# Altium PCB Battery PCB 8x4 Rev.PcbDoc
Units mm, origin at the board's own origin, x right, y up, seen from the top; angles counter-clockwise.
Board outline 138 x 291 mm, 2 copper layers (Top Layer, Bottom Layer), stack 1.571 mm thick; 33 components, 16 nets, 112 pads, 0 vias.
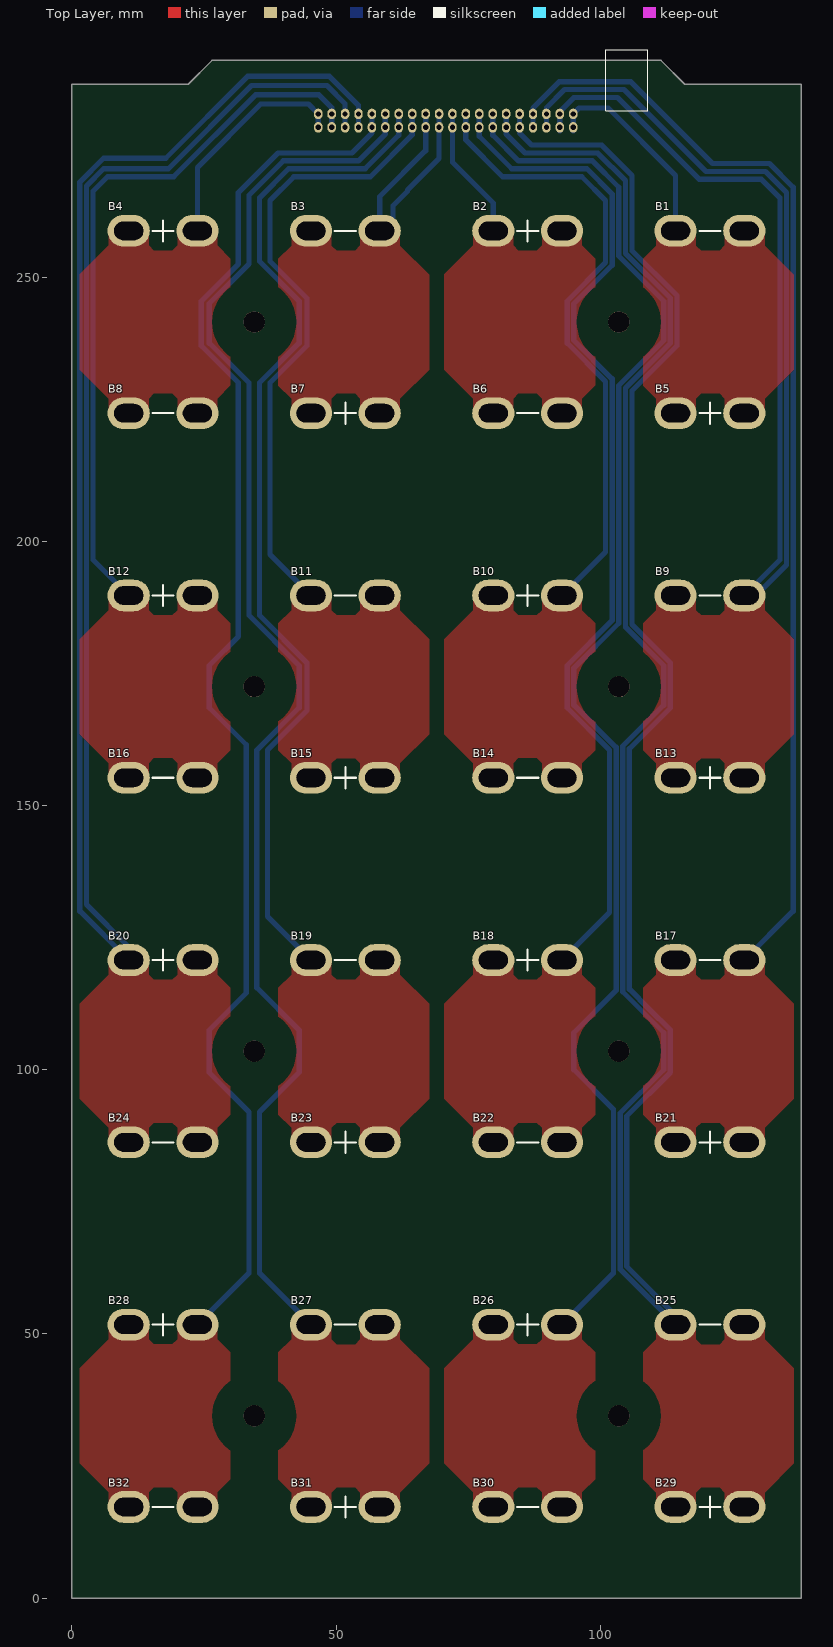
[diagram p0: Top Layer view]
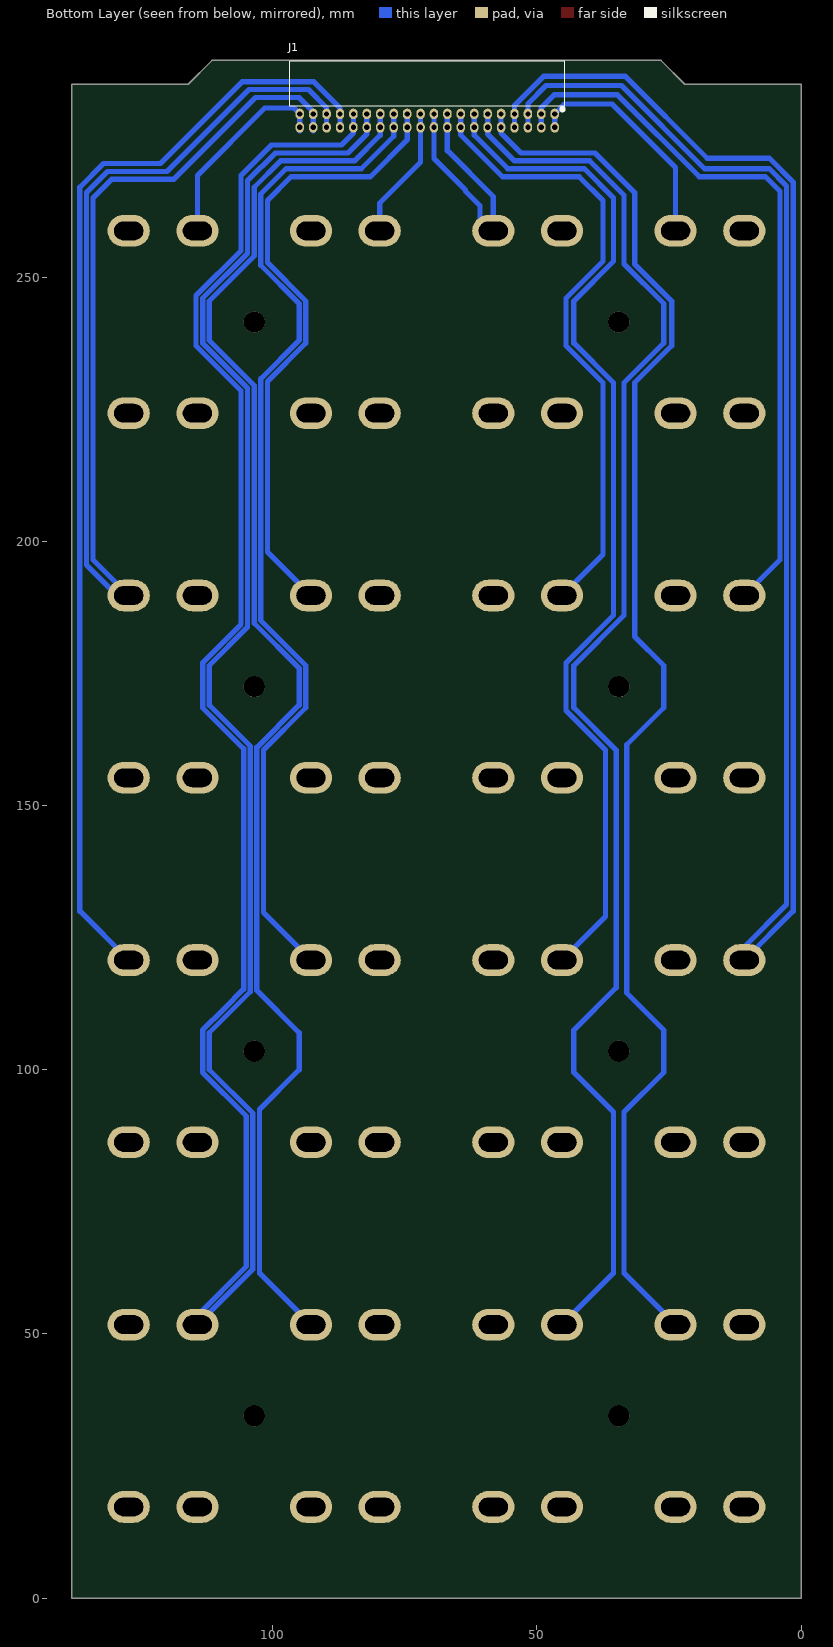
[diagram p1: Bottom Layer view, seen from below]

## Layer stack, top to bottom
Top Solder: solder mask 0.0102, Solder Resist, Dk 3.5
Top Layer: signal copper 0.0356
Dielectric 1: dielectric 1.5, FR-4, Dk 4.8
Bottom Layer: signal copper 0.0356
Bottom Solder: solder mask 0.0102, Solder Resist, Dk 3.5

## Board outline
0,0 0,286.5 22,286.5 26.5,291 111.5,291 116,286.5 138,286.5 138,0

## Design rules (kind name [scope] priority, off if disabled: settings)
Clearance Clearance_MountHoles [InPoly vs IsPad and NOT InAnyNet] p1: gap=6 ignorepadtopadclearanceinfootprint=FALSE
Clearance [All] p2: gap=0.254 ignorepadtopadclearanceinfootprint=FALSE except(0: Arc-Hole Track-Hole SMDPad-Hole THPad-Hole Via-Hole Fill-Hole Poly-Hole Region-Hole Text-Hole)
PolygonConnect PolygonConnect_NoRelief [Name = 'NoRelief'] p1: connectstyle=Direct reliefconductorwidth=0.254 reliefentries=4 polygonreliefangle="90 Angle" airgapwidth=0.254
PolygonConnect [All] p2: connectstyle=Relief reliefconductorwidth=0.254 reliefentries=4 polygonreliefangle="90 Angle" airgapwidth=0.254
RoutingVias [All] p1: holewidth=0.711 width=1.27 viastyle="Through Hole" minholewidth=0.711 minwidth=1.27 maxholewidth=0.711 maxwidth=1.27
SolderMaskExpansion [All] p1: expansion=0.102 istentingtop=FALSE
Width [All] p1 off: maxlimit=0.254 minlimit=0.254 preferedwidth=0.254
30 further rules are at their usual default settings.

## Components (designator, comment, footprint, x,y, rotation, side; value= is the part's Value field where it differs from the comment)
B1 "Negative side of battery" BF_BATT_N 120.75,258.75 r180 top
B2 "Positive side of battery" BF_BATT_P 86.25,258.75 r180 top
B3 "Negative side of battery" BF_BATT_N 51.75,258.75 r180 top
B4 "Positive side of battery" BF_BATT_P 17.25,258.75 r180 top
B5 "Positive side of battery" BF_BATT_P 120.75,224.25 r180 top
B6 "Negative side of battery" BF_BATT_N 86.25,224.25 r180 top
B7 "Positive side of battery" BF_BATT_P 51.75,224.25 r180 top
B8 "Negative side of battery" BF_BATT_N 17.25,224.25 r180 top
B9 "Negative side of battery" BF_BATT_N 120.75,189.75 r180 top
B10 "Positive side of battery" BF_BATT_P 86.25,189.75 r180 top
B11 "Negative side of battery" BF_BATT_N 51.75,189.75 r180 top
B12 "Positive side of battery" BF_BATT_P 17.25,189.75 r180 top
B13 "Positive side of battery" BF_BATT_P 120.75,155.25 r180 top
B14 "Negative side of battery" BF_BATT_N 86.25,155.25 r180 top
B15 "Positive side of battery" BF_BATT_P 51.75,155.25 r180 top
B16 "Negative side of battery" BF_BATT_N 17.25,155.25 r180 top
B17 "Negative side of battery" BF_BATT_N 120.75,120.75 r180 top
B18 "Positive side of battery" BF_BATT_P 86.25,120.75 r180 top
B19 "Negative side of battery" BF_BATT_N 51.75,120.75 r180 top
B20 "Positive side of battery" BF_BATT_P 17.25,120.75 r180 top
B21 "Positive side of battery" BF_BATT_P 120.75,86.25 r180 top
B22 "Negative side of battery" BF_BATT_N 86.25,86.25 r180 top
B23 "Positive side of battery" BF_BATT_P 51.75,86.25 r180 top
B24 "Negative side of battery" BF_BATT_N 17.25,86.25 r180 top
B25 "Negative side of battery" BF_BATT_N 120.75,51.75 r180 top
B26 "Positive side of battery" BF_BATT_P 86.25,51.75 r180 top
B27 "Negative side of battery" BF_BATT_N 51.75,51.75 r180 top
B28 "Positive side of battery" BF_BATT_P 17.25,51.75 r180 top
B29 "Positive side of battery" BF_BATT_P 120.75,17.25 r180 top
B30 "Negative side of battery" BF_BATT_N 86.25,17.25 r180 top
B31 "Positive side of battery" BF_BATT_P 51.75,17.25 r180 top
B32 "Negative side of battery" BF_BATT_N 17.25,17.25 r180 top
J1 "Conn Recept 40Pos 0.1\" dual row TH RA" PPTC202LJBN-RC 70.75,280.88 r0 bottom value=PPTC202LJBN-RC

## Footprints (in the part's own frame and the unit in brackets; to place one, negate y for a bottom-side part, rotate by r counter-clockwise, add the part's x,y. Pads: shape width x height; smd on the part's side, far side on the other; paste and mask are expansions set on the pad)
BF_BATT_N [mm]
  oval 8x6 hole 3.5 slot 5.5 at 0 deg: 1(-6.5,0) 1(6.5,0)
  silkscreen extent -2,0 2,0
BF_BATT_P [mm]
  oval 8x6 hole 3.5 slot 5.5 at 0 deg: 1(-6.5,0) 1(6.5,0)
  silkscreen extent -2,-2 2,2
PPTC202LJBN-RC [mm]
  oval 1.6x2 hole 1: 1(-24.13,0) 2(-24.13,2.54) 3(-21.59,0) 4(-21.59,2.54) 5(-19.05,0) 6(-19.05,2.54) 7(-16.51,0) 8(-16.51,2.54) 9(-13.97,0) 10(-13.97,2.54) 11(-11.43,0) 12(-11.43,2.54) 13(-8.89,0) 14(-8.89,2.54) 15(-6.35,0) 16(-6.35,2.54) 17(-3.81,0) 18(-3.81,2.54) 19(-1.27,0) 20(-1.27,2.54) 21(1.27,0) 22(1.27,2.54) 23(3.81,0) 24(3.81,2.54) 25(6.35,0) 26(6.35,2.54) 27(8.89,0) 28(8.89,2.54) 29(11.43,0) 30(11.43,2.54) 31(13.97,0) 32(13.97,2.54) 33(16.51,0) 34(16.51,2.54) 35(19.05,0) 36(19.05,2.54) 37(21.59,0) 38(21.59,2.54) 39(24.13,0) 40(24.13,2.54)
  silkscreen extent -26,-10 26,-0.59, body extent -25.65,-10.1 25.65,-1.6, height 5.08

## Part data
B1 B3 B6 B8 B9 B11 B14 B16 B17 B19 B22 B24 B25 B27 B30 B32: library part BF_BATT_N, Dist=Digi-Key
B2 B4 B5 B7 B10 B12 B13 B15 B18 B20 B21 B23 B26 B28 B29 B31: library part BF_BATT_P, Dist=Digi-Key
J1: library part PPTC202LJBN-RC, Dist=Digi-Key, Dist P/N=S5534-ND, HelpURL=https://drawings-pdf.s3.amazonaws.com/10494.pdf, Mfg="Sullins Connector Solutions", Mfgr P/N=PPTC202LJBN-RC, Price=2.75

## Free pads (board coordinates)
  round 4 hole 4 unplated: ""(34.5,34.5) ""(34.5,103.5) ""(34.5,172.5) ""(34.5,241.5) ""(103.5,34.5) ""(103.5,103.5) ""(103.5,172.5) ""(103.5,241.5)

## Nets (pads, with @x,y where several pads share a name; then routed paths per layer and width w, separated by ;. In a path a pad name is that pad's centre, name@x,y a point inside that pad or via, vN(x,y) a via of type N, cw(c..) or ccw(c..) an arc to the next point about the centre after c; other vN are vias at no path point)
1: B4.1 B8.1 J1.1 J1.2 | length 43.2
  Bottom Layer w1: B4.1@23.75,258.75 23.75,270.75 35.75,282.75 44.75,282.75 J1.1 J1.2
3: B12.1 B16.1 J1.3 J1.4 | length 136.8
  Bottom Layer w1: B12.1@10.75,189.75 4,196.5 4,266.25 6.75,269 19.25,269 34.75,284.5 46.75,284.5 49.16,282.09 J1.3 J1.4
5: B20.1 B24.1 J1.5 J1.6 J1.7 J1.8 | length 431.1
  Bottom Layer w1: J1.6 J1.5 51.7,282.8 48.25,286.25 34,286.25 18.25,270.5 6,270.5 2.75,267.25 2.75,131.25 10.75,123.25 10.75,120.75 1.5,130 1.5,268 6,272.5 17.75,272.5 33.25,288 48.75,288 54.24,282.51 J1.7 J1.8
7: B28.1 B32.1 J1.9 J1.10 | length 268.8
  Bottom Layer w1: B28.1@23.75,51.75 33.5,61.5 33.5,92 26,99.5 26,107.5 33,114.5 33,161.5 26,168.5 26,176.5 31.5,182 31.5,230 24.5,237 24.5,245.5 31.5,252.5 31.5,266 39,273.5 53,273.5 56.78,277.28 J1.10 J1.9
9: B27.1 B31.1 J1.11 J1.12 | length 272.1
  Bottom Layer w1: B27.1@45.25,51.75 35.5,61.5 35.5,92 43,99.5 43,107.5 35,115.5 35,160.5 43,168.5 43,176.5 33.5,186 33.5,230 26,237.5 26,245 33.5,252.5 33.5,265.5 40,272 54.25,272 59.32,277.07 J1.12 J1.11
11: B19.1 B23.1 J1.13 J1.14 | length 196
  Bottom Layer w1: B19.1@45.25,120.75 37,129 37,160.5 44.5,168 44.5,177 35.5,186 35.5,230 43,237.5 43,245.5 35.5,253 35.5,265 41,270.5 55.5,270.5 61.86,276.86 J1.14 J1.13
13: B11.1 B15.1 J1.15 J1.16 | length 119.8
  Bottom Layer w1: B11.1@45.25,189.75 37.5,197.5 37.5,230 44.5,237 44.5,246 37.5,253 37.5,264.5 42,269 56.5,269 64.4,276.9 J1.16 J1.15
15: B3.1 B7.1 J1.17 J1.18 J1.19 J1.20 | length 52.5
  Bottom Layer w1: J1.17 J1.18 66.94,273.94 58.25,265.25 58.25,258.75 60.75,261.25 60.75,263.5 63.5,266.25 63.5,266.5 69.48,272.48 J1.20 J1.19
17: B2.1 B6.1 J1.21 J1.22 | length 25.3
  Bottom Layer w1: J1.21 J1.22 72.02,271.73 79.75,264 B2.1@79.75,258.75
19: B10.1 B14.1 J1.23 J1.24 | length 120.3
  Bottom Layer w1: J1.23 J1.24 74.56,275.94 81.5,269 96.5,269 101,264.5 101,252.75 93.75,245.5 93.75,237.5 101,230.25 101,198 B10.1@92.75,189.75
21: B18.1 B22.1 J1.25 J1.26 | length 195.5
  Bottom Layer w1: J1.25 J1.26 77.1,276.65 83.25,270.5 97.5,270.5 102.25,265.75 102.25,252.25 95,245 95,238 102.25,230.75 102.25,185 93.75,176.5 93.75,168.5 101.75,160.5 101.75,129.75 B18.1@92.75,120.75
23: B26.1 B30.1 J1.27 J1.28 | length 271.5
  Bottom Layer w1: J1.27 J1.28 79.64,276.86 84.5,272 98.5,272 103.5,267 103.5,254 112,245.5 112,238 103.5,229.5 103.5,184.5 95,176 95,169 103,161 103,115 95,107 95,100 102.5,92.5 102.5,61.5 B26.1@92.75,51.75
25: B25.1 B29.1 J1.29 J1.30 J1.31 J1.32 | length 540.2
  Bottom Layer w1: J1.29 J1.30 82.18,277.07 85.75,273.5 99.5,273.5 104.75,268.25 104.75,254.5 113.25,246 113.25,237.5 104.75,229 104.75,183.75 112,176.5 112,169 104.25,161.25 104.25,114.75 112,107 112,100 103.75,91.75 103.75,62.25 114.25,51.75 114.25,53.5 105,62.75 105,91.25 113.25,99.5 113.25,107.5 109.25,111.5 105.5,115.25 105.5,160.75 113.25,168.5 113.25,177 106,184.25 106,228.5 114.5,237 114.5,246.5 106,255 106,269.25 100.25,275 87,275 84.72,277.28 J1.32 J1.31
27: B17.1 B21.1 J1.33 J1.34 | length 213.3
  Bottom Layer w1: J1.34 J1.33 87.26,282.01 92.25,287 105.75,287 121.25,271.5 132,271.5 136.5,267 136.5,130 B17.1@127.25,120.75
29: B9.1 B13.1 J1.35 J1.36 J1.37 J1.38 | length 270.8
  Bottom Layer w1: J1.36 J1.35 89.8,282.05 93.25,285.5 104.5,285.5 120,270 131.25,270 135.25,266 135.25,195.5 129.5,189.75 127.25,189.75 134,196.5 134,265 130.5,268.5 118.75,268.5 103.25,284 95,284 J1.37@92.34,281.34 ; J1.38@92.34,277.71 J1.38 J1.37@92.34,280.25
31: B1.1 B5.1 J1.39 J1.40 | length 38.8
  Bottom Layer w1: J1.40@94.88,277.71 94.88,280.25 J1.39 96,282 101.5,282 114.25,269.25 B1.1@114.25,258.75

## Polygon pours and split planes (outlines as drawn)
25 on Top Layer "NoRelief" (solid, pour order 57): 131.086,17.482 131.086,19.982 136.586,25.482 136.586,43.482 131.086,48.982 131.086,51.482 123.586,51.482 123.586,48.984 122.588,47.982 119.086,47.982 118.086,48.982 118.086,51.482 110.586,51.482 110.586,48.982 108.086,46.482 108.086,22.482 110.586,19.982 110.586,17.482 118.086,17.482 118.086,19.982 119.086,20.982 122.586,20.982 123.586,19.982 123.586,17.482
23 on Top Layer "NoRelief" (solid, pour order 56): 76,51.5 76,49 70.5,43.5 70.5,25.5 76,20 76,17.5 83.5,17.5 83.5,19.998 84.498,21 88,21 89,20 89,17.5 96.5,17.5 96.5,20 99,22.5 99,46.5 96.5,49 96.5,51.5 89,51.5 89,49 88,48 84.5,48 83.5,49 83.5,51.5
9 on Top Layer "NoRelief" (solid, pour order 55): 62.086,17.482 62.086,19.982 67.586,25.482 67.586,43.482 62.086,48.982 62.086,51.482 54.586,51.482 54.586,48.984 53.588,47.982 50.086,47.982 49.086,48.982 49.086,51.482 41.586,51.482 41.586,48.982 39.086,46.482 39.086,22.482 41.586,19.982 41.586,17.482 49.086,17.482 49.086,19.982 50.086,20.982 53.586,20.982 54.586,19.982 54.586,17.482
7 on Top Layer "NoRelief" (solid, pour order 54): 7,51.5 7,49 1.5,43.5 1.5,25.5 7,20 7,17.5 14.5,17.5 14.5,19.998 15.498,21 19,21 20,20 20,17.5 27.5,17.5 27.5,20 30,22.5 30,46.5 27.5,49 27.5,51.5 20,51.5 20,49 19,48 15.5,48 14.5,49 14.5,51.5
27 on Top Layer "NoRelief" (solid, pour order 53): 131.086,86.482 131.086,88.982 136.586,94.482 136.586,112.482 131.086,117.982 131.086,120.482 123.586,120.482 123.586,117.984 122.588,116.982 119.086,116.982 118.086,117.982 118.086,120.482 110.586,120.482 110.586,117.982 108.086,115.482 108.086,91.482 110.586,88.982 110.586,86.482 118.086,86.482 118.086,88.982 119.086,89.982 122.586,89.982 123.586,88.982 123.586,86.482
21 on Top Layer "NoRelief" (solid, pour order 52): 76,120.5 76,118 70.5,112.5 70.5,94.5 76,89 76,86.5 83.5,86.5 83.5,88.998 84.498,90 88,90 89,89 89,86.5 96.5,86.5 96.5,89 99,91.5 99,115.5 96.5,118 96.5,120.5 89,120.5 89,118 88,117 84.5,117 83.5,118 83.5,120.5
11 on Top Layer "NoRelief" (solid, pour order 51): 62.086,86.482 62.086,88.982 67.586,94.482 67.586,112.482 62.086,117.982 62.086,120.482 54.586,120.482 54.586,117.984 53.588,116.982 50.086,116.982 49.086,117.982 49.086,120.482 41.586,120.482 41.586,117.982 39.086,115.482 39.086,91.482 41.586,88.982 41.586,86.482 49.086,86.482 49.086,88.982 50.086,89.982 53.586,89.982 54.586,88.982 54.586,86.482
5 on Top Layer "NoRelief" (solid, pour order 50): 7,120.5 7,118 1.5,112.5 1.5,94.5 7,89 7,86.5 14.5,86.5 14.5,88.998 15.498,90 19,90 20,89 20,86.5 27.5,86.5 27.5,89 30,91.5 30,115.5 27.5,118 27.5,120.5 20,120.5 20,118 19,117 15.5,117 14.5,118 14.5,120.5
29 on Top Layer "NoRelief" (solid, pour order 41): 131.086,155.482 131.086,157.982 136.586,163.482 136.586,181.482 131.086,186.982 131.086,189.482 123.586,189.482 123.586,186.984 122.588,185.982 119.086,185.982 118.086,186.982 118.086,189.482 110.586,189.482 110.586,186.982 108.086,184.482 108.086,160.482 110.586,157.982 110.586,155.482 118.086,155.482 118.086,157.982 119.086,158.982 122.586,158.982 123.586,157.982 123.586,155.482
19 on Top Layer "NoRelief" (solid, pour order 40): 76,189.5 76,187 70.5,181.5 70.5,163.5 76,158 76,155.5 83.5,155.5 83.5,157.998 84.498,159 88,159 89,158 89,155.5 96.5,155.5 96.5,158 99,160.5 99,184.5 96.5,187 96.5,189.5 89,189.5 89,187 88,186 84.5,186 83.5,187 83.5,189.5
13 on Top Layer "NoRelief" (solid, pour order 39): 62.086,155.482 62.086,157.982 67.586,163.482 67.586,181.482 62.086,186.982 62.086,189.482 54.586,189.482 54.586,186.984 53.588,185.982 50.086,185.982 49.086,186.982 49.086,189.482 41.586,189.482 41.586,186.982 39.086,184.482 39.086,160.482 41.586,157.982 41.586,155.482 49.086,155.482 49.086,157.982 50.086,158.982 53.586,158.982 54.586,157.982 54.586,155.482
3 on Top Layer "NoRelief" (solid, pour order 38): 7,189.5 7,187 1.5,181.5 1.5,163.5 7,158 7,155.5 14.5,155.5 14.5,157.998 15.498,159 19,159 20,158 20,155.5 27.5,155.5 27.5,158 30,160.5 30,184.5 27.5,187 27.5,189.5 20,189.5 20,187 19,186 15.5,186 14.5,187 14.5,189.5
31 on Top Layer "NoRelief" (solid, pour order 37): 131.086,224.482 131.086,226.982 136.586,232.482 136.586,250.482 131.086,255.982 131.086,258.482 123.586,258.482 123.586,255.984 122.588,254.982 119.086,254.982 118.086,255.982 118.086,258.482 110.586,258.482 110.586,255.982 108.086,253.482 108.086,229.482 110.586,226.982 110.586,224.482 118.086,224.482 118.086,226.982 119.086,227.982 122.586,227.982 123.586,226.982 123.586,224.482
17 on Top Layer "NoRelief" (solid, pour order 36): 76,258.5 76,256 70.5,250.5 70.5,232.5 76,227 76,224.5 83.5,224.5 83.5,226.998 84.498,228 88,228 89,227 89,224.5 96.5,224.5 96.5,227 99,229.5 99,253.5 96.5,256 96.5,258.5 89,258.5 89,256 88,255 84.5,255 83.5,256 83.5,258.5
15 on Top Layer "NoRelief" (solid, pour order 35): 62.086,224.482 62.086,226.982 67.586,232.482 67.586,250.482 62.086,255.982 62.086,258.482 54.586,258.482 54.586,255.984 53.588,254.982 50.086,254.982 49.086,255.982 49.086,258.482 41.586,258.482 41.586,255.982 39.086,253.482 39.086,229.482 41.586,226.982 41.586,224.482 49.086,224.482 49.086,226.982 50.086,227.982 53.586,227.982 54.586,226.982 54.586,224.482
1 on Top Layer "NoRelief" (solid, pour order 19): 7,258.5 7,256 1.5,250.5 1.5,232.5 7,227 7,224.5 14.5,224.5 14.5,226.998 15.498,228 19,228 20,227 20,224.5 27.5,224.5 27.5,227 30,229.5 30,253.5 27.5,256 27.5,258.5 20,258.5 20,256 19,255 15.5,255 14.5,256 14.5,258.5

## Silkscreen, mask and mechanical layers (free items; w line width, h text height)
Top Overlay:
  lines w0.2: 101,281.5 101,293 109,293 109,281.5 101,281.5
Mechanical 1:
  the board outline again, w0.254
Mechanical 2:
  circle w0.254: c17.25,51.75 r17.25
  circle w0.254: c17.25,17.25 r17.25
  lines w0.254: 15.75,17.25 18.75,17.25 ; 15.75,51.75 18.75,51.75 ; 15.75,86.25 18.75,86.25 ; 15.75,120.75 18.75,120.75 ; 15.75,155.25 18.75,155.25 ; 15.75,189.75 18.75,189.75 ; 15.75,224.25 18.75,224.25 ; 15.75,258.75 18.75,258.75 ; 17.25,15.75 17.25,18.75 ; 17.25,17.25 51.75,51.75 ; 17.25,50.25 17.25,53.25 ; 17.25,51.75 51.75,17.25 ; 17.25,84.75 17.25,87.75 ; 17.25,119.25 17.25,122.25 ; 17.25,153.75 17.25,156.75 ; 17.25,188.25 17.25,191.25 ; 17.25,222.75 17.25,225.75 ; 17.25,257.25 17.25,260.25 ; 50.25,17.25 53.25,17.25 ; 50.25,51.75 53.25,51.75 ; 50.25,86.25 53.25,86.25 ; 50.25,120.75 53.25,120.75 ; 50.25,155.25 53.25,155.25 ; 50.25,189.75 53.25,189.75 ; 50.25,224.25 53.25,224.25 ; 50.25,258.75 53.25,258.75 ; 51.75,15.75 51.75,18.75 ; 51.75,50.25 51.75,53.25 ; 51.75,84.75 51.75,87.75 ; 51.75,119.25 51.75,122.25 ; 51.75,153.75 51.75,156.75 ; 51.75,188.25 51.75,191.25 ; 51.75,222.75 51.75,225.75 ; 51.75,257.25 51.75,260.25 ; 84.75,17.25 87.75,17.25 ; 84.75,51.75 87.75,51.75 ; 84.75,86.25 87.75,86.25 ; 84.75,120.75 87.75,120.75 ; 84.75,155.25 87.75,155.25 ; 84.75,189.75 87.75,189.75 ; 84.75,224.25 87.75,224.25 ; 84.75,258.75 87.75,258.75 ; 86.25,15.75 86.25,18.75 ; 86.25,50.25 86.25,53.25 ; 86.25,84.75 86.25,87.75 ; 86.25,119.25 86.25,122.25 ; 86.25,153.75 86.25,156.75 ; 86.25,188.25 86.25,191.25 ; 86.25,222.75 86.25,225.75 ; 86.25,257.25 86.25,260.25 ; 119.25,17.25 122.25,17.25 ; 119.25,51.75 122.25,51.75 ; 119.25,86.25 122.25,86.25 ; 119.25,120.75 122.25,120.75 ; 119.25,155.25 122.25,155.25 ; 119.25,189.75 122.25,189.75 ; 119.25,224.25 122.25,224.25 ; 119.25,258.75 122.25,258.75 ; 120.75,15.75 120.75,18.75 ; 120.75,50.25 120.75,53.25 ; 120.75,84.75 120.75,87.75 ; 120.75,119.25 120.75,122.25 ; 120.75,153.75 120.75,156.75 ; 120.75,188.25 120.75,191.25 ; 120.75,222.75 120.75,225.75 ; 120.75,257.25 120.75,260.25